# Altium PCB PCB_VHDCI_breakout.PCBDOC (part 3 of 3)
Units mil, origin at the board's own origin, x right, y up, seen from the top; angles counter-clockwise.
Board outline 6299 x 3937 mil, 4 copper layers (TopLayer, Internal Plane 1, Internal Plane 2, BottomLayer), stack 35.551 mil thick; 61 components, 167 nets, 639 pads, 297 vias.
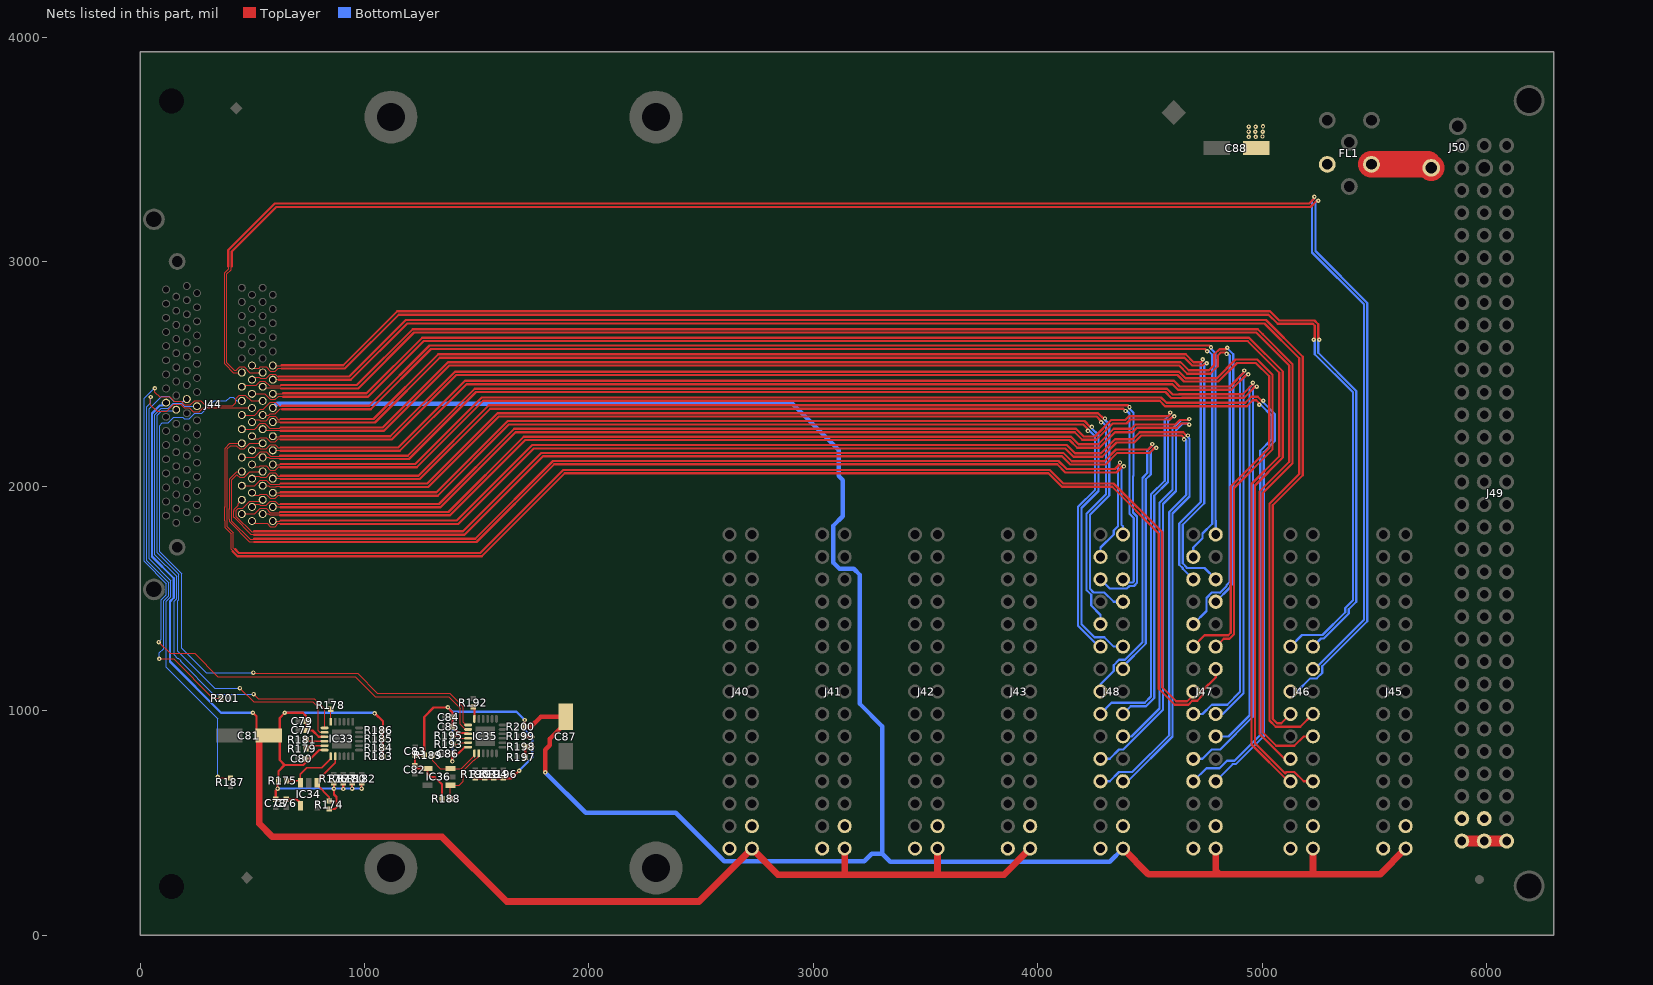
[diagram p5: the nets of this part, all layers, seen from the top]

## Via types
v1: diameter 19.68, hole 7.87, TopLayer to BottomLayer, tented both sides, 274 vias
v2: diameter 23.62, hole 11.81, TopLayer to BottomLayer, tented both sides, 23 vias

## Nets (pads, with @x,y where several pads share a name; then routed paths per layer and width w, separated by ;. In a path a pad name is that pad's centre, name@x,y a point inside that pad or via, vN(x,y) a via of type N, cw(c..) or ccw(c..) an arc to the next point about the centre after c; other vN are vias at no path point) (continued)
LVDS6_4_N: J44.U46 J46.12 | length 6381.9
  TopLayer w5: J44.U46@591.53,2538.23 592.7,2537.05 629.02,2537.05 631.52,2539.55
  TopLayer w10: 631.52,2539.55 905.52,2539.55 1146.02,2780.05 5035.02,2780.05 5076.02,2739.05 5233.24,2739.05 5250.02,2722.27 5250.02,2657.9 v1(5254.87,2653.05)
  BottomLayer w10: J46.12@5226.57,1285.67 5262.95,1322.05 5275.24,1322.05 5386.02,1432.84 5386.02,1452.05 5420.02,1486.05 5420.02,2425.27 5250.02,2595.27 5250.02,2648.21 v1(5254.87,2653.05)
LVDS6_4_P: J44.U12 J46.11 | length 6550.8
  TopLayer w5: J44.U12@499.01,2538.23 510.18,2527.05 530.91,2527.05 535.81,2531.95 562.15,2531.95 581.08,2513.01 601.97,2513.01 616.02,2527.05 629.02,2527.05 631.52,2524.55
  TopLayer w10: 631.52,2524.55 911.74,2524.55 1152.24,2765.05 5028.81,2765.05 5069.81,2724.05 5227.02,2724.05 5235.02,2716.05 5235.02,2657.9 v1(5230.18,2653.05)
  BottomLayer w10: J46.11@5126.57,1285.67 5177.95,1337.05 5269.02,1337.05 5371.02,1439.05 5371.02,1458.27 5405.02,1492.27 5405.02,2419.05 5235.02,2589.05 5235.02,2648.21 v1(5230.18,2653.05)
LVDS6_5_N: J44.U47 J46.15 | length 8099
  TopLayer w5: 408.52,2980.55 406.02,2978.05 406.02,2966.05 387.02,2947.05 387.02,2550.2 420.49,2516.73 428.07,2516.73 443.29,2531.95 464.18,2531.95 489.39,2506.73 J44.U47@546.25,2506.73
  TopLayer w10: 408.52,2980.55 408.52,3046.55 607.02,3245.05 5216.24,3245.05 5243.71,3272.52 v1(5250.55,3272.52)
  BottomLayer w10: J46.15@5126.57,1085.67 5155.85,1085.67 5214.36,1144.17 5243.76,1144.17 5268.07,1168.48 5268.07,1197.88 5469.02,1398.84 5469.02,2817.27 5237.63,3048.66 5237.63,3266.45 5243.71,3272.52 v1(5250.55,3272.52)
LVDS6_5_P: J44.U13 J46.14 | length 7853.9
  TopLayer w5: 393.52,2980.55 396.02,2978.05 396.02,2970.2 377.02,2951.2 377.02,2546.05 416.35,2506.73 J44.U13@453.73,2506.73
  TopLayer w10: 393.52,2980.55 393.52,3052.77 600.81,3260.05 5210.02,3260.05 5233.1,3283.13 v1(5233.1,3289.98)
  BottomLayer w10: J46.14@5226.57,1185.67 5234.64,1185.67 5454.02,1405.05 5454.02,2811.05 5222.63,3042.45 5222.63,3272.66 5233.1,3283.13 v1(5233.1,3289.98)
LVDS6_6_N: J44.U48 J46.18 | length 6642.5
  TopLayer w5: J44.U48@591.53,2475.24 593.35,2477.05 615.37,2477.05 617.87,2474.55
  TopLayer w10: 617.87,2474.55 938.74,2474.55 1190.24,2726.05 5011.02,2726.05 5166.02,2571.05 5166.02,2055.27 5033.02,1922.27 5033.02,956.84 5060.81,929.05 5169.95,929.05 J46.18@5226.57,985.67
LVDS6_6_P: J44.U14 J46.17 | length 6648.6
  TopLayer w5: J44.U14@499.01,2475.24 510.83,2487.05 530.27,2487.05 535.81,2481.52 562.15,2481.52 581.08,2500.45 601.97,2500.45 615.37,2487.05 617.87,2489.55
  TopLayer w10: 617.87,2489.55 932.52,2489.55 1184.02,2741.05 5017.24,2741.05 5181.02,2577.27 5181.02,2049.05 5048.02,1916.05 5048.02,963.05 5067.02,944.05 5084.95,944.05 J46.17@5126.57,985.67
LVDS6_7_N: J44.U49 J46.21 | length 6622
  TopLayer w5: J44.U49@546.25,2443.74 551.25,2438.74 627.02,2438.74 629.52,2436.24
  TopLayer w10: 629.52,2436.24 972.42,2436.24 1221.24,2685.05 4974.02,2685.05 5121.02,2538.05 5121.02,2109.27 4988.02,1976.27 4988.02,898.05 5100.41,785.67 J46.21@5126.57,785.67
LVDS6_7_P: J44.U15 J46.20 | length 6830.5
  TopLayer w5: J44.U15@453.73,2443.74 460.01,2450.02 516.87,2450.02 535.81,2468.96 556.7,2468.96 576.91,2448.74 627.02,2448.74 629.52,2451.24
  TopLayer w10: 629.52,2451.24 966.21,2451.24 1215.02,2700.05 4980.24,2700.05 5003.02,2677.27 5136.02,2544.27 5136.02,2103.05 5003.02,1970.05 5003.02,904.27 5063.12,844.17 5143.76,844.17 5185.25,885.67 J46.20@5226.57,885.67
LVDS6_8_N: J44.U50 J46.24 | length 6708.8
  TopLayer w5: J44.U50@591.53,2412.24 626.83,2412.24 627.02,2412.05 636.02,2412.05 638.52,2414.55
  TopLayer w10: 638.52,2414.55 1009.52,2414.55 1257.02,2662.05 4942.24,2662.05 5092.02,2512.27 5092.02,2128.05 4968.02,2004.05 4968.02,855.27 5102.75,720.54 5109.38,727.17 5143.76,727.17 5185.25,685.67 J46.24@5226.57,685.67
LVDS6_8_P: J44.U16 J46.23 | length 6706.4
  TopLayer w5: J44.U16@499.01,2412.24 555.87,2412.24 581.08,2387.03 601.97,2387.03 617.19,2402.24 619.95,2402.24 620.14,2402.05 636.02,2402.05 638.52,2399.55
  TopLayer w10: 638.52,2399.55 1015.74,2399.55 1263.24,2647.05 4936.02,2647.05 5077.02,2506.05 5077.02,2134.27 4953.02,2010.27 4953.02,849.05 5116.41,685.67 J46.23@5126.57,685.67
LVDS7_1_N: J44.U53 J47.3 | length 5302.5
  TopLayer w5: J44.U53@546.25,2317.76 573.22,2317.76 579.5,2324.03 601.97,2324.03 623.99,2346.05 631.02,2346.05 633.52,2343.55
  TopLayer w10: 633.52,2343.55 1027.74,2343.55 1296.24,2612.05 4745.18,2612.05 v1(4755.1,2602.13)
  BottomLayer w10: J47.3@4693.5,1685.67 4693.5,1726.99 4735,1768.48 4735,1790.03 4778.5,1833.53 4778.5,1837.45 4778.02,1837.92 4778.02,2538.07 4778.29,2538.34 4778.29,2558.92 4778.02,2559.19 4778.02,2586.05 4761.95,2602.13 v1(4755.1,2602.13)
LVDS7_1_P: J44.U19 J47.2 | length 5308.1
  TopLayer w5: J44.U19@453.73,2317.76 510.59,2317.76 535.81,2342.97 549.59,2342.97 581.08,2374.47 601.97,2374.47 620.39,2356.05 631.02,2356.05 633.52,2358.55
  TopLayer w10: 633.52,2358.55 1021.52,2358.55 1290.02,2627.05 4765.09,2627.05 v1(4772.55,2619.59)
  BottomLayer w10: v1(4772.55,2619.59) 4772.55,2612.74 4793.02,2592.27 4793.02,2565.4 4793.29,2565.13 4793.29,2532.13 4793.02,2531.86 4793.02,1848.05 4793.5,1847.58 J47.2@4793.5,1785.67
LVDS7_2_N: J44.U54 J47.6 | length 5421.8
  TopLayer w5: J44.U54@591.53,2286.26 592.32,2287.05 623.02,2287.05 625.52,2284.55
  TopLayer w10: 625.52,2284.55 1046.74,2284.55 1335.24,2573.05 4653.81,2573.05 4688.7,2538.16 4736.13,2538.16 4746.6,2548.63 v1(4753.45,2548.63)
  BottomLayer w10: v1(4753.45,2548.63) 4751.02,2551.05 4749.02,2551.05 4742.02,2544.05 4742.02,1924.05 4646.63,1828.66 4646.63,1656.66 4662.68,1640.62 4662.68,1637.71 4664.33,1636.05 4743.11,1636.05 J47.6@4793.5,1585.67
LVDS7_2_P: J44.U20 J47.5 | length 5453.3
  TopLayer w5: J44.U20@499.01,2286.26 509.8,2297.05 531.29,2297.05 535.81,2292.54 562.15,2292.54 581.08,2311.48 601.97,2311.48 616.39,2297.05 623.02,2297.05 625.52,2299.55
  TopLayer w10: 625.52,2299.55 1040.52,2299.55 1329.02,2588.05 4660.02,2588.05 4694.92,2553.16 4729.92,2553.16 4735.99,2559.24 v1(4735.99,2566.09)
  BottomLayer w10: J47.5@4693.5,1585.67 4646.02,1633.15 4646.02,1636.05 4631.02,1651.05 4631.02,1834.27 4727.02,1930.27 4727.02,2550.27 4738.42,2561.66 4738.42,2563.66 v1(4735.99,2566.09)
LVDS7_3_N: J44.U55 J47.9 | length 5810.7
  TopLayer w5: J44.U55@546.25,2254.76 551.25,2249.76 623.02,2249.76 625.52,2247.26
  TopLayer w10: 625.52,2247.26 1087.45,2247.26 1378.24,2538.05 4630.81,2538.05 4666.81,2502.05 4769.24,2502.05 4802.02,2534.84 4802.02,2582.4 4816.02,2596.4 4835.68,2596.4 v1(4842.02,2590.05)
  BottomLayer w10: J47.9@4693.5,1385.67 4752,1444.17 4752,1502.86 4776.31,1527.17 4810.69,1527.17 4812.23,1525.62 4841.35,1554.73 4841.35,1559.59 4856.47,1574.71 4856.47,2582.61 4847.02,2592.05 4844.02,2592.05 v1(4842.02,2590.05)
LVDS7_3_P: J44.U21 J47.8 | length 5791.8
  TopLayer w5: J44.U21@453.73,2254.76 510.59,2254.76 535.81,2279.98 556.7,2279.98 576.91,2259.76 623.02,2259.76 625.52,2262.26
  TopLayer w10: 625.52,2262.26 1081.23,2262.26 1372.02,2553.05 4637.02,2553.05 4673.02,2517.05 4763.02,2517.05 4787.02,2541.05 4787.02,2588.61 4809.81,2611.4 4838.68,2611.4 v1(4845.02,2617.74)
  BottomLayer w10: J47.8@4793.5,1485.67 4857.02,1549.19 4857.02,1554.05 4872.02,1569.05 4872.02,1573.05 4871.47,1573.61 4871.47,2588.82 4845.02,2615.27 v1(4845.02,2617.74)
LVDS7_4_N: J44.U56 J47.12 | length 5982.5
  TopLayer w5: J44.U56@591.53,2223.27 593.74,2221.05 623.02,2221.05 625.52,2223.55
  TopLayer w10: 625.52,2223.55 1115.52,2223.55 1403.02,2511.05 4629.53,2511.05 4658.53,2482.05 4799.02,2482.05 4882.02,2565.05 4978.24,2565.05 5047.02,2496.27 5047.02,2164.84 4875.02,1992.84 4875.02,1340.84 4855.24,1321.05 4828.88,1321.05 J47.12@4793.5,1285.67
LVDS7_4_P: J44.U22 J47.11 | length 6151.3
  TopLayer w5: J44.U22@499.01,2223.27 511.22,2211.05 529.87,2211.05 535.81,2216.99 562.15,2216.99 581.08,2198.05 601.97,2198.05 614.98,2211.05 623.02,2211.05 625.52,2208.55
  TopLayer w10: 625.52,2208.55 1121.74,2208.55 1409.24,2496.05 4623.31,2496.05 4652.31,2467.05 4805.24,2467.05 4888.24,2550.05 4972.02,2550.05 5032.02,2490.05 5032.02,2171.05 4860.02,1999.05 4860.02,1347.05 4849.02,1336.05 4743.88,1336.05 J47.11@4693.5,1285.67
LVDS7_5_N: J44.U57 J47.15 | length 5933.6
  TopLayer w5: 422.63,1721.13 419.09,1721.13 415.72,1724.5 415.72,1793.13 412.79,1796.05 388.67,1820.18 388.67,1849.65 388.52,1849.8 388.52,1903.82 388.67,1903.97 388.67,2166.41 404.02,2181.77 428.07,2181.77 443.29,2166.55 464.18,2166.55 489.39,2191.77 J44.U57@546.25,2191.77
  TopLayer w10: 422.63,1721.13 440.36,1703.39 1516.36,1703.39 1886.02,2073.05 4054.24,2073.05 4114.24,2013.05 4338.24,2013.05 4555.02,1796.27 4555.02,1104.05 4617.02,1042.05 4666.02,1042.05 4693.5,1069.53 J47.15@4693.5,1085.67
LVDS7_5_P: J44.U23 J47.14 | length 6034.2
  TopLayer w5: 412.02,1710.52 412.02,1714.05 405.72,1720.36 405.72,1788.98 378.67,1816.03 378.67,1845.5 378.52,1845.65 378.52,1907.97 378.67,1908.12 378.67,2170.56 399.88,2191.77 J44.U23@453.73,2191.77
  TopLayer w10: 412.02,1710.52 434.15,1688.39 1522.58,1688.39 1892.24,2058.05 4048.02,2058.05 4108.02,1998.05 4332.02,1998.05 4540.02,1790.05 4540.02,1097.84 4610.81,1027.05 4672.24,1027.05 4689.36,1044.17 4710.69,1044.17 4735,1068.48 4735,1089.81 4793.5,1148.32 J47.14@4793.5,1185.67
LVDS7_6_N: J44.U58 J47.18 | length 6105.1
  TopLayer w5: J44.U58@591.53,2160.28 592.31,2161.05 623.02,2161.05 625.52,2158.55
  TopLayer w10: 625.52,2158.55 1157.74,2158.55 1454.24,2455.05 4600.81,2455.05 4625.81,2430.05 4863.02,2430.05 4931.6,2498.63 v1(4938.45,2498.63)
  BottomLayer w10: J47.18@4793.5,985.67 4824.64,985.67 4917.02,1078.05 4917.02,2484.05 4931.6,2498.63 v1(4938.45,2498.63)
LVDS7_6_P: J44.U24 J47.17 | length 6298.8
  TopLayer w5: J44.U24@499.01,2160.28 509.79,2171.05 531.31,2171.05 535.81,2166.55 562.15,2166.55 581.08,2185.49 601.97,2185.49 616.41,2171.05 623.02,2171.05 625.52,2173.55
  TopLayer w10: 625.52,2173.55 1151.52,2173.55 1448.02,2470.05 4607.02,2470.05 4632.02,2445.05 4856.81,2445.05 4920.99,2509.24 v1(4920.99,2516.09)
  BottomLayer w10: J47.17@4693.5,985.67 4734.82,985.67 4776.31,1027.17 4844.92,1027.17 4902.02,1084.27 4902.02,2490.27 4920.99,2509.24 v1(4920.99,2516.09)
LVDS7_7_N: J44.U59 J47.21 | length 6414.6
  TopLayer w5: J44.U59@546.25,2128.78 573.22,2128.78 577.94,2124.05 622.02,2124.05 624.52,2121.55
  TopLayer w10: 624.52,2121.55 1198.74,2121.55 1497.24,2420.05 4569.81,2420.05 4595.81,2394.05 4643.02,2394.05 4644.02,2395.05 4920.02,2395.05 4969.6,2444.63 v1(4976.45,2444.63)
  BottomLayer w10: J47.21@4693.5,785.67 4734.82,785.67 4776.31,827.17 4813.35,827.17 4959.02,972.84 4959.02,2434.05 4969.6,2444.63 v1(4976.45,2444.63)
LVDS7_7_P: J44.U25 J47.20 | length 6363.8
  TopLayer w5: J44.U25@453.73,2128.78 510.59,2128.78 535.81,2154 562.15,2154 582.09,2134.05 622.02,2134.05 624.52,2136.55
  TopLayer w10: 624.52,2136.55 1192.52,2136.55 1491.02,2435.05 4576.02,2435.05 4602.02,2409.05 4630.02,2409.05 4631.02,2410.05 4913.81,2410.05 4958.99,2455.24 v1(4958.99,2462.09)
  BottomLayer w10: J47.20@4793.5,885.67 4850.64,885.67 4944.02,979.05 4944.02,2440.27 4958.99,2455.24 v1(4958.99,2462.09)
LVDS7_8_N: J44.U60 J47.24 | length 6400
  TopLayer w5: J44.U60@591.53,2097.28 591.76,2097.05 623.02,2097.05 625.52,2099.55
  TopLayer w10: 625.52,2099.55 1226.52,2099.55 1523.02,2396.05 4550.02,2396.05 4574.02,2372.05 4925.31,2372.05 4952.31,2399.05 4980.24,2399.05 4998.21,2381.09 v1(5005.05,2381.09)
  BottomLayer w10: J47.24@4793.5,685.67 4869.88,762.05 4883.24,762.05 5007.02,885.84 5007.02,2152.05 5057.02,2202.05 5057.02,2322.27 5005.05,2374.24 v1(5005.05,2381.09)
LVDS7_8_P: J44.U26 J47.23 | length 6568.8
  TopLayer w5: J44.U26@499.01,2097.28 509.24,2087.05 531.86,2087.05 535.81,2091 562.15,2091 581.08,2072.07 601.97,2072.07 616.96,2087.05 623.02,2087.05 625.52,2084.55
  TopLayer w10: 625.52,2084.55 1232.74,2084.55 1529.24,2381.05 4543.81,2381.05 4567.81,2357.05 4931.52,2357.05 4958.52,2384.05 4974.02,2384.05 4987.6,2370.48 v1(4987.6,2363.63)
  BottomLayer w10: J47.23@4693.5,685.67 4752,744.17 4810.69,744.17 4843.57,777.05 4877.02,777.05 4992.02,892.05 4992.02,2158.27 5042.02,2208.27 5042.02,2316.05 4994.45,2363.63 v1(4987.6,2363.63)
LVDS8_1_N: J44.U61 J48.3 | length 4969.8
  TopLayer w5: 507.52,1766.55 505.02,1764.05 490.02,1764.05 408.67,1845.41 408.67,1857.93 408.52,1858.08 408.52,1895.54 408.67,1895.69 408.67,2028.55 431.98,2051.87 443.29,2040.57 464.18,2040.57 489.39,2065.79 J44.U61@546.25,2065.79
  TopLayer w10: 507.52,1766.55 1493.52,1766.55 1840.02,2113.05 4093.02,2113.05 4129.02,2077.05 4344.81,2077.05 4366.99,2099.24 v1(4366.99,2106.09)
  BottomLayer w10: J48.3@4280.11,1685.67 4280.11,1726.99 4338.62,1785.49 4338.62,1802.86 4358.31,1822.55 4358.02,1822.84 4358.02,2090.27 4366.99,2099.24 v1(4366.99,2106.09)
LVDS8_1_P: J44.U27 J48.2 | length 4767.4
  TopLayer w5: J44.U27@453.73,2065.79 431.76,2065.79 398.67,2032.7 398.67,1899.83 398.52,1899.68 398.52,1853.94 398.67,1853.79 398.67,1841.27 485.88,1754.05 505.02,1754.05 507.52,1751.55
  TopLayer w10: 507.52,1751.55 1499.74,1751.55 1846.24,2098.05 4086.81,2098.05 4122.81,2062.05 4351.02,2062.05 4377.6,2088.63 v1(4384.45,2088.63)
  BottomLayer w10: J48.2@4380.11,1785.67 4380.11,1821.96 4373.02,1829.05 4373.02,2084.05 4377.6,2088.63 v1(4384.45,2088.63)
LVDS8_2_N: J44.U62 J48.6 | length 4770.3
  TopLayer w5: J44.U62@591.53,2034.29 592.29,2035.05 623.02,2035.05 625.52,2032.55
  TopLayer w10: 625.52,2032.55 1246.74,2032.55 1560.24,2346.05 4381.18,2346.05 v1(4391.6,2335.63)
  BottomLayer w10: J48.6@4380.11,1585.67 4394.73,1571.05 4423.02,1571.05 4428.02,1576.05 4428.02,1859.05 4409.63,1877.45 4409.63,2324.45 4398.45,2335.63 v1(4391.6,2335.63)
LVDS8_2_P: J44.U28 J48.5 | length 5054.3
  TopLayer w5: J44.U28@499.01,2034.29 509.77,2045.05 531.32,2045.05 535.81,2040.57 562.15,2040.57 581.08,2059.51 601.97,2059.51 616.43,2045.05 623.02,2045.05 625.52,2047.55
  TopLayer w10: 625.52,2047.55 1240.52,2047.55 1554.02,2361.05 4401.09,2361.05 v1(4409.05,2353.09)
  BottomLayer w10: J48.5@4280.11,1585.67 4321.61,1544.17 4397.3,1544.17 4409.18,1556.05 4429.24,1556.05 4443.02,1569.84 4443.02,1865.27 4424.63,1883.66 4424.63,2044.82 4426.87,2047.05 4426.87,2328.43 4409.05,2346.24 v1(4409.05,2353.09)
LVDS8_3_N: J44.U63 J48.9 | length 4857.2
  TopLayer w5: J44.U63@546.25,2002.79 573.22,2002.79 576.94,1999.07 606.11,1999.07 607.1,2000.05 623.02,2000.05 625.52,1997.55
  TopLayer w10: 625.52,1997.55 1285.52,1997.55 1599.02,2311.05 4263.02,2311.05 4282.6,2291.48 v1(4282.6,2284.63)
  BottomLayer w10: J48.9@4280.11,1385.67 4280.11,1426.99 4238.62,1468.48 4238.62,1516.56 4218.18,1537 4218.18,1879.42 4304.02,1965.27 4304.02,2270.05 4289.45,2284.63 v1(4282.6,2284.63)
LVDS8_3_P: J44.U29 J48.8 | length 4978.9
  TopLayer w5: J44.U29@453.73,2002.79 510.59,2002.79 535.81,2028.01 562.15,2028.01 581.08,2009.07 601.97,2009.07 602.95,2010.05 623.02,2010.05 625.52,2012.55
  TopLayer w10: 625.52,2012.55 1279.31,2012.55 1592.81,2326.05 4269.24,2326.05 4293.21,2302.09 v1(4300.05,2302.09)
  BottomLayer w10: v1(4300.05,2302.09) 4300.05,2295.24 4319.02,2276.27 4319.02,1959.05 4233.18,1873.21 4233.18,1543.21 4249.22,1527.17 4297.3,1527.17 4338.8,1485.67 J48.8@4380.11,1485.67
LVDS8_4_N: J44.U64 J48.12 | length 4943
  TopLayer w5: J44.U64@591.53,1971.3 591.77,1971.05 623.02,1971.05 625.52,1973.55
  TopLayer w10: 625.52,1973.55 1320.52,1973.55 1638.02,2291.05 4208.24,2291.05 4234.71,2264.59 v1(4241.55,2264.59)
  BottomLayer w10: v1(4241.55,2264.59) 4241.55,2257.74 4271.02,2228.27 4271.02,1979.05 4195.02,1903.05 4195.02,1385.27 4253.13,1327.17 4297.3,1327.17 4338.8,1285.67 J48.12@4380.11,1285.67
LVDS8_4_P: J44.U30 J48.11 | length 4949.1
  TopLayer w5: J44.U30@499.01,1971.3 509.25,1961.05 531.84,1961.05 535.81,1965.02 562.15,1965.02 581.08,1946.08 601.97,1946.08 616.95,1961.05 623.02,1961.05 625.52,1958.55
  TopLayer w10: 625.52,1958.55 1326.74,1958.55 1644.24,2276.05 4202.02,2276.05 4224.1,2253.98 v1(4224.1,2247.13)
  BottomLayer w10: v1(4224.1,2247.13) 4230.95,2247.13 4256.02,2222.05 4256.02,1985.27 4180.02,1909.27 4180.02,1379.05 4273.41,1285.67 J48.11@4280.11,1285.67
LVDS8_5_N: J44.U65 J48.15 | length 5686.2
  TopLayer w5: 508.52,1799.55 506.02,1797.05 497.02,1797.05 428.67,1865.41 428.67,1866.22 428.52,1866.37 428.52,1887.26 428.67,1887.41 428.67,1893.26 437.43,1902.03 457.07,1902.03 488.56,1933.52 539.97,1933.52 J44.U65@546.25,1939.8
  TopLayer w10: 508.52,1799.55 1439.52,1799.55 1789.02,2149.05 4114.53,2149.05 4151.53,2112.05 4296.81,2112.05 4348.81,2164.05 4492.81,2164.05 4510.49,2181.74 v1(4510.49,2188.59)
  BottomLayer w10: J48.15@4280.11,1085.67 4280.11,1118.36 4338.62,1176.86 4338.62,1202.86 4362.93,1227.17 4388.92,1227.17 4467.02,1305.27 4467.02,2037.45 4488.63,2059.05 4488.63,2159.87 4511.42,2182.66 4511.42,2187.66 v1(4510.49,2188.59)
LVDS8_5_P: J44.U31 J48.14 | length 5476.5
  TopLayer w5: J44.U31@453.73,1939.8 436.51,1922.58 436.51,1915.25 418.67,1897.41 418.67,1891.55 418.52,1891.4 418.52,1862.22 418.67,1862.07 418.67,1861.27 492.88,1787.05 506.02,1787.05 508.52,1784.55
  TopLayer w10: 508.52,1784.55 1445.74,1784.55 1795.24,2134.05 4108.31,2134.05 4145.31,2097.05 4303.02,2097.05 4355.02,2149.05 4499.02,2149.05 4521.1,2171.13 v1(4527.95,2171.13)
  BottomLayer w10: J48.14@4380.11,1185.67 4380.11,1197.14 4482.02,1299.05 4482.02,2031.23 4503.63,2052.84 4503.63,2153.66 4522.02,2172.05 4527.02,2172.05 v1(4527.95,2171.13)
LVDS8_6_N: J44.U66 J48.18 | length 5678.8
  TopLayer w5: J44.U66@591.53,1908.31 592.28,1909.05 623.02,1909.05 625.52,1906.55
  TopLayer w10: 625.52,1906.55 1338.74,1906.55 1673.24,2241.05 4164.81,2241.05 4198.58,2207.29 4261.6,2207.29 4334.37,2280.05 4396.02,2280.05 4413.52,2297.55 4587.74,2297.55 4601.71,2311.52 v1(4608.55,2311.52)
  BottomLayer w10: J48.18@4380.11,985.67 4414.5,1020.05 4483.24,1020.05 4520.02,1056.84 4520.02,1958.05 4581.02,2019.05 4581.02,2290.84 4601.71,2311.52 v1(4608.55,2311.52)
LVDS8_6_P: J44.U32 J48.17 | length 5872.6
  TopLayer w5: J44.U32@499.01,1908.31 509.76,1919.05 531.34,1919.05 535.81,1914.59 562.15,1914.59 581.08,1933.52 601.97,1933.52 616.44,1919.05 623.02,1919.05 625.52,1921.55
  TopLayer w10: 625.52,1921.55 1332.52,1921.55 1667.02,2256.05 4171.02,2256.05 4204.79,2222.29 4255.39,2222.29 4328.16,2295.05 4389.81,2295.05 4407.31,2312.55 4581.52,2312.55 4591.1,2322.13 v1(4591.1,2328.98)
  BottomLayer w10: J48.17@4280.11,985.67 4329.5,1035.05 4477.02,1035.05 4505.02,1063.05 4505.02,1964.27 4566.02,2025.27 4566.02,2297.05 4591.1,2322.13 v1(4591.1,2328.98)
LVDS8_7_N: J44.U67 J48.21 | length 6043.1
  TopLayer w5: J44.U67@546.25,1876.81 573.22,1876.81 576.94,1873.09 622.02,1873.09 624.52,1870.59
  TopLayer w10: 624.52,1870.59 1380.77,1870.59 1716.24,2206.05 4141.81,2206.05 4175.81,2172.05 4275.87,2172.05 4344.87,2241.05 4423.02,2241.05 4443.02,2261.05 4620.02,2261.05 4639.02,2280.05 4670.18,2280.05 v1(4675.02,2275.21)
  BottomLayer w10: J48.21@4280.11,785.67 4321.43,785.67 4362.93,827.17 4381.35,827.17 4558.02,1003.84 4558.02,1921.05 4616.02,1979.05 4616.02,2250.05 4646.02,2280.05 4670.18,2280.05 v1(4675.02,2275.21)
LVDS8_7_P: J44.U33 J48.20 | length 6017.1
  TopLayer w5: J44.U33@453.73,1876.81 510.59,1876.81 535.81,1902.03 562.15,1902.03 581.08,1883.09 622.02,1883.09 624.52,1885.59
  TopLayer w10: 624.52,1885.59 1374.56,1885.59 1710.02,2221.05 4148.02,2221.05 4182.02,2187.05 4269.65,2187.05 4338.65,2256.05 4416.81,2256.05 4436.81,2276.05 4613.81,2276.05 4632.81,2295.05 4670.18,2295.05 v1(4675.02,2299.9)
  BottomLayer w10: J48.20@4380.11,885.67 4418.64,885.67 4543.02,1010.05 4543.02,1927.27 4601.02,1985.27 4601.02,2256.27 4639.81,2295.05 4670.18,2295.05 v1(4675.02,2299.9)
LVDS8_8_N: J44.U68 J48.24 | length 5958.3
  TopLayer w5: J44.U68@591.53,1845.31 591.79,1845.05 623.02,1845.05 625.52,1847.55
  TopLayer w10: 625.52,1847.55 1411.52,1847.55 1748.02,2184.05 4129.02,2184.05 4166.02,2147.05 4281.81,2147.05 4344.81,2210.05 4423.81,2210.05 4454.81,2241.05 4648.24,2241.05 4662.71,2226.59 v1(4669.55,2226.59)
  BottomLayer w10: J48.24@4380.11,685.67 4401.64,685.67 4601.02,885.05 4601.02,1879.05 4676.92,1954.95 4676.92,2212.37 4669.55,2219.74 v1(4669.55,2226.59)
LVDS8_8_P: J44.U34 J48.23 | length 6123.9
  TopLayer w5: J44.U34@499.01,1845.31 509.27,1835.05 566.13,1835.05 581.08,1820.1 601.97,1820.1 616.93,1835.05 623.02,1835.05 625.52,1832.55
  TopLayer w10: 625.52,1832.55 1417.74,1832.55 1754.24,2169.05 4122.81,2169.05 4159.81,2132.05 4288.02,2132.05 4351.02,2195.05 4430.02,2195.05 4461.02,2226.05 4642.02,2226.05 4652.1,2215.98 v1(4652.1,2209.13)
  BottomLayer w10: J48.23@4280.11,685.67 4321.43,685.67 4362.93,727.17 4421.92,727.17 4586.02,891.27 4586.02,1885.27 4661.92,1961.16 4661.92,2206.16 4658.95,2209.13 v1(4652.1,2209.13)
NetFL1_1: FL1.1 J50.1 | length 272.8
  TopLayer w118.11: FL1.1@5487.43,3434.57 5738.2,3434.57 J50.1@5753.78,3419
NetIC33_1: IC33.1 IC34.3 R175.1 | length 278
  TopLayer w6: R175.1@653.53,688.05 705.8,688.05 IC34.3@714.62,679.24 714.62,717.65 743.02,746.05 810.02,746.05 849.81,785.84 IC33.1@849.81,797.28
NetIC33_2: IC33.2 IC34.1 R174.1 | length 253.5
  TopLayer w6: R174.1@844.02,599.56 844.02,615.05 789.43,669.65 IC34.1@789.43,679.24 789.43,688.46 869.5,768.53 IC33.2@869.5,797.28
NetIC33_18: IC33.18 R178.2 | length 55.8
  TopLayer w5: IC33.18@849.81,950.83 849.81,1006.34 R178.2@850.02,1006.55
NetIC33_22: IC33.22 R181.2 | length 84.6
  TopLayer w6: R181.2@740.53,871.05 747.37,864.21 IC33.22@822.25,864.21
NetIC33_23: IC33.23 R179.2 | length 87.7
  TopLayer w6: R179.2@740.53,830.05 755,844.53 IC33.23@822.25,844.53
NetIC35_1: IC35.1 IC36.3 R189.1 | length 260.1
  TopLayer w5: R189.1@1303.53,802.05 1303.53,776.55 1337.62,742.46 IC36.3@1383.2,742.46 1432.43,742.46 1489.81,799.84 IC35.1@1489.81,810.28
NetIC35_2: IC35.2 IC36.1 R188.1 | length 280.4
  TopLayer w5: R188.1@1382.53,607.05 1383.2,607.73 IC36.1@1383.2,667.65 1421.62,667.65 1440.02,686.05 1440.02,731.58 1486.84,778.4 1490.37,778.4 1509.5,797.53 IC35.2@1509.5,810.28
NetIC35_18: IC35.18 R192.2 | length 55.7
  TopLayer w10: R192.2@1485.02,1017.55 1489.81,1012.76 IC35.18@1489.81,963.83
NetIC35_22: IC35.22 R195.2 | length 72.2
  TopLayer w5: R195.2@1394.53,888.05 1420.02,888.05 1430.87,877.21 IC35.22@1462.25,877.21
NetIC35_23: IC35.23 R193.2 | length 70.8
  TopLayer w5: R193.2@1394.53,850.05 1425.02,850.05 1432.5,857.53 IC35.23@1462.25,857.53
NetJ44_L18: J44.L18 R187.2 | length 2054.6
  TopLayer w5: v1(346.02,705.05) 350.52,700.56 R187.2@403.02,700.56
  BottomLayer w5: J44.L18@208.46,2388.62 208.46,2379.15 150.77,2379.15 127.87,2402.05 97.02,2402.05 40.02,2345.05 40.02,1676.98 137.73,1579.27 137.73,1509.03 116.02,1487.32 116.02,1194.05 346.02,964.05 v1(346.02,705.05)
NetJ44_U18: J44.U18 R201.2 | length 2115.5
  TopLayer w5: v1(48.02,2398.05) 46.02,2396.05 46.02,2364.05 76.02,2334.05 104.45,2334.05 105.49,2335.1 119.27,2335.1 150.77,2366.59 180.68,2366.59 196.43,2350.85 218.9,2350.85 237.84,2331.91 264.18,2331.91 281.52,2349.25 J44.U18@499.01,2349.25 ; v1(86,1231) 149.08,1231 324.02,1056.05 R201.2@361.52,1056.05
  BottomLayer w5: v1(48.02,2398.05) 48.02,2373.02 30,2355 30,1669 127.73,1571.27 127.73,1513.17 105,1490.44 105,1277 86,1258 v1(86,1231)
P3V3_MP1: C76.2 C77.2 C78.2 C79.2 C80.2 C81.1 IC33.21 IC33.24 IC34.4 J40.30 J41.30 J42.30 J43.30 J44.L52 R174.2 R175.2 R176.2 R177.2 R180.2 R182.2 R183.2 R184.2 R185.2 R186.2 | length 8408.1
  TopLayer w10: v1(503.02,991.05) 519.02,975.05 C81.1@519.02,908.05 ; IC34.4@708.02,595.05 698.31,604.77 C76.2@652.02,604.77 C78.2@605.02,604.77 605.02,645.05 v1(613.02,653.05) 613.02,684.56 R175.2@616.52,688.05 616.52,730.55 644.02,758.05 ; IC33.24@822.25,824.84 798.81,824.84 761.02,787.05 C80.2@738.74,787.05 738.74,769.77 727.02,758.05 644.02,758.05 ; IC33.21@822.25,883.9 796.18,883.9 768.02,912.05 C77.2@739.74,912.05 C79.2@739.74,954.05 739.74,976.34 725.02,991.05 v1(645.02,991.05) 622.02,968.05 622.02,780.05 644.02,758.05 ; R174.2@844.02,561.55 866.52,561.55 875.02,570.05 875.02,616.05 864.02,627.05 v1(864.02,652.05) R176.2@864.02,677.55 ; v1(905.02,651.05) R177.2@905.02,677.55 ; v1(945.02,653.05) R180.2@945.02,677.55 ; v1(987.02,653.05) R182.2@987.02,678.55 ; v1(1045.02,988.05) 1047.02,988.05 1082.53,952.55 R186.2@1082.53,912.05 R185.2@1082.53,874.05 R184.2@1082.53,835.05 R183.2@1082.53,796.05
  TopLayer w20: J43.30@3951.64,385.67 J43.30@3966.73,385.67
  TopLayer w30: C81.1@531.02,872.05 531.02,497.05 590.02,438.05 1346.02,438.05 1634.02,150.05 2490.95,150.05 J40.30@2726.57,385.67 2843.19,269.05 3135.02,269.05 ; J41.30@3139.96,385.67 3139.96,273.99 3135.02,269.05 ; J42.30@3553.34,385.67 3553.34,271.74 3556.02,269.05 ; J43.30@3966.73,385.67 3850.11,269.05 3556.02,269.05 ; 3135.02,269.05 3556.02,269.05
  BottomLayer w10: J44.L52@115.94,2372.87 101.02,2372.87 101.02,2360.16 88.31,2360.16 53.03,2324.88 53.03,1687.05 150.23,1589.85 150.23,1503.85 133.02,1486.64 133.02,1218.99 360.96,991.05 v1(503.02,991.05) ; v1(613.02,653.05) v1(945.02,653.05) v1(987.02,653.05) ; v1(645.02,991.05) 1042.02,991.05 v1(1045.02,988.05)
P3V3_MP2: C82.2 C83.2 C84.2 C85.2 C86.2 C87.1 IC35.21 IC35.24 IC36.4 J44.U52 J45.30 J46.30 J47.30 J48.30 R188.2 R189.2 R190.2 R191.2 R194.2 R196.2 R197.2 R198.2 R199.2 R200.2 | length 11548.7
  TopLayer w10: R188.2@1345.52,607.05 1345.52,671.87 1313.34,704.05 1298.02,704.05 1280.84,721.24 IC36.4@1280.84,742.46 1236.34,742.46 C82.2@1225.02,753.77 1225.02,801.34 C83.2@1226.02,802.34 1266.24,802.34 R189.2@1266.52,802.05 1266.52,972.55 1308.02,1014.05 1371.02,1014.05 1392.74,992.34 C84.2@1392.74,970.05 C85.2@1392.74,928.05 1420.24,900.55 1458.59,900.55 IC35.21@1462.25,896.9 ; v1(1392.02,774.05) 1391.74,774.34 C86.2@1391.74,809.05 1418.02,809.05 1446.81,837.84 IC35.24@1462.25,837.84 ; R190.2@1494.02,699.55 R191.2@1535.02,699.55 R194.2@1577.02,699.55 R196.2@1618.02,699.55 1655.52,699.55 v1(1689.02,733.05) ; R200.2@1714.53,928.05 v1(1714.53,958.56) ; R199.2@1715.53,887.05 1719.53,883.05 v1(1747.02,883.05) ; R197.2@1716.53,793.05 R198.2@1716.53,839.05 1747.02,839.05 v1(1748.02,840.05)
  TopLayer w20: R200.2@1714.53,928.05 1741.02,928.05 1786.61,973.64 C87.1@1897.02,973.64 1897.02,945.05 1826.02,874.05 1826.02,846.05 1806.02,826.05 v1(1806.02,725.05)
  TopLayer w30: J48.30@4380.11,385.67 4494.73,271.05 4811.02,271.05 ; J47.30@4793.5,385.67 4793.5,288.58 4811.02,271.05 ; J46.30@5226.57,385.67 5226.57,271.6 5226.02,271.05 ; J45.30@5639.96,385.67 5525.34,271.05 5226.02,271.05 ; 4811.02,271.05 5226.02,271.05
  BottomLayer w10: v1(1372.02,1015.05) 1392.02,995.05 ; v1(1392.02,774.05) 1392.02,995.05 ; v1(1689.02,733.05) 1748.02,792.05 v1(1748.02,840.05) 1748.02,882.05 v1(1747.02,883.05) 1714.53,915.55 v1(1714.53,958.56) 1678.03,995.05 1392.02,995.05
  BottomLayer w20: J44.U52@591.53,2349.25 611.33,2369.05 2907.02,2369.05 3114.02,2162.05 3114.02,2046.05 3132.02,2028.05 3132.02,1867.05 3090.02,1825.05 3090.02,1659.05 3116.91,1632.17 3180.91,1632.17 3208.02,1605.05 3208.02,1030.05 3308.02,930.05 3308.02,362.05 ; v1(1806.02,725.05) 1986.02,545.05 2387.02,545.05 2603.02,329.05 3227.02,329.05 3260.02,362.05 3308.02,362.05 ; J48.30@4380.11,385.67 4321.11,326.67 3343.41,326.67 3308.02,362.05
P5V0: J49.a32 J49.b32 J49.c32 | length 200
  TopLayer w50: J49.c32@5890,419 J49.b32@5990,419 J49.a32@6090,419
P12V0: C88.1 FL1.2 J40.28 J40.29 J41.28 J41.29 J42.28 J42.29 J43.28 J43.29 J45.28 J45.29 J46.28 J46.29 J47.28 J47.29 J48.28 J48.29 J49.b31 J49.c31
  other v1: 4941.02,3557.05 4972,3557 5002,3559 4970,3580 5003,3580 4940,3581 4971,3602 4941.02,3603.05 5004,3604
VHDCI1_SCL: IC33.19 J44.L17 | length 2185.8
  TopLayer w5: v1(506.02,1074.05) 526.02,1054.05 776.02,1054.05 822.25,1007.83 IC33.19@822.25,923.27
  BottomLayer w5: J44.L17@253.73,2357.13 197.91,2357.13 185.89,2369.15 147.88,2369.15 126.38,2347.66 93.48,2347.66 65.53,2319.7 65.53,1695.47 162.73,1598.27 162.73,1498.67 152.02,1487.97 152.02,1249.05 166.68,1234.4 170.21,1234.4 180.37,1224.24 180.37,1220.71 327.02,1074.05 v1(506.02,1074.05)
VHDCI1_SDA: IC33.20 J44.L51 | length 2051.9
  TopLayer w5: v1(445.02,1101.05) 507.02,1039.05 769.02,1039.05 793.02,1015.05 793.02,911.05 800.5,903.58 IC33.20@822.25,903.58
  BottomLayer w5: J44.L51@161.21,2341.38 157.49,2337.66 97.63,2337.66 77.02,2317.05 77.02,1702.98 172.73,1607.27 172.73,1494.53 169.02,1490.82 169.02,1264.05 332.02,1101.05 v1(445.02,1101.05)
VHDCI2_SCL: IC35.19 J44.U17 | length 2926.1
  TopLayer w5: J44.U17@453.73,2380.75 J44.U17@453.73,2382.34 ; v1(505.02,1170.05) 509.02,1166.05 970.02,1166.05 1058.02,1078.05 1380.02,1078.05 1439.52,1018.55 1439.52,948.55 1451.81,936.27 IC35.19@1462.25,936.27
  BottomLayer w5: J44.U17@453.73,2380.75 431.86,2380.75 415.21,2397.4 400.84,2397.4 384.19,2380.75 329.72,2380.75 274.02,2325.05 243.54,2325.05 218.9,2300.41 198.01,2300.41 190.37,2308.05 150.02,2308.05 125.02,2283.05 99.02,2283.05 87.02,2271.05 87.02,1708.98 186.02,1609.98 186.02,1279.05 295.02,1170.05 v1(505.02,1170.05)
VHDCI2_SDA: IC35.20 J44.U51 | length 3368.4
  TopLayer w5: v1(66.33,2437.36) 66.33,2419.75 87.99,2398.09 131.83,2398.09 151.87,2378.05 183.36,2378.05 198.01,2363.41 224.35,2363.41 243.29,2382.34 270.74,2382.34 293.02,2360.05 412.55,2360.05 425.37,2372.87 425.37,2389.4 441.93,2405.96 469.63,2405.96 494.84,2380.75 J44.U51@546.25,2380.75 ; v1(83,1306) 133.95,1255.05 243.02,1255.05 347.02,1151.05 958.02,1151.05 1047.02,1062.05 1375.02,1062.05 1426.02,1011.05 1426.02,940.05 1449.5,916.58 IC35.20@1462.25,916.58
  BottomLayer w5: v1(66.33,2437.36) 62.8,2437.36 18,2392.56 18,1666 117.73,1566.27 117.73,1517.31 95,1494.58 95,1318 v1(83,1306)
pads on no net: FTG25.FTG2 FTG26.1 FTG27.1 FTG28.1 IC33.12 IC33.13 IC33.14 IC33.15 IC33.16 IC33.17 IC34.5 IC35.12 IC35.13 IC35.14 IC35.15 IC35.16 IC35.17 IC36.5 J49.a1 J49.a2 J49.a3 J49.a4 J49.a5 J49.a6 J49.a7 J49.a8 J49.a10 J49.a12 J49.a13 J49.a14 J49.a15 J49.a16 J49.a18 J49.a20 J49.a21 J49.a22 J49.a23 J49.a24 J49.a25 J49.a26 J49.a27 J49.a28 J49.a29 J49.a30 J49.a31 J49.b1 J49.b3 J49.b4 J49.b5 J49.b6 J49.b7 J49.b8 J49.b9 J49.b10 J49.b11 J49.b13 J49.b14 J49.b15 J49.b16 J49.b17 J49.b18 J49.b19 J49.b21 J49.b24 J49.b25 J49.b26 J49.b27 J49.b28 J49.b29 J49.b30 J49.c1 J49.c2 J49.c3 J49.c4 J49.c5 J49.c6 J49.c7 J49.c8 J49.c10 J49.c11 J49.c12 J49.c13 J49.c14 J49.c15 J49.c16 J49.c17 J49.c18 J49.c19 J49.c20 J49.c21 J49.c22 J49.c23 J49.c24 J49.c25 J49.c26 J49.c27 J49.c28 J49.c29 J49.c30 J49.MTG1 J49.MTG2 J50.3

## Polygon pours and split planes (outlines as drawn)
GND on TopLayer "top_gnd" (solid, remove dead copper, pour order 0): 240,3819 6090,3819 6090,3619 6240,3619 6240,319 6090,319 6090,119 240,119 240,319 -2,319 -2,3619 240,3619
GND on BottomLayer "top_gnd" (solid, remove dead copper, pour order 2): 240,3819 6090,3819 6090,3619 6240,3619 6240,319 6090,319 6090,123.09 6092.52,120.57 6090.95,119 240,119 240,319 -2,319 -2,3619 240,3619
INPUT_GND on Internal Plane 1 (split plane): 5836.58,3490.58 5837.23,3490.15 5838,3489.99 6039.17,3489.99 6064.99,3464.17 6064.99,3381.83 6040.17,3357.01 5742.83,3357.01 5529.42,3570.42 5528.77,3570.85 5528,3571.01 5452.83,3571.01 5404.01,3619.83 5404.01,3656.17 5442.83,3694.99 5632.17,3694.99
GND on Internal Plane 1 (split plane): 6278.9,20.1 20.1,20.1 20.1,3916.9 6278.9,3916.9
P12V0 on Internal Plane 2 (split plane): 5844.44,3552.65 5844.44,602.36 5844.64,600.82 5844.99,599.98 5845.24,599.38 5846.18,598.15 5865.87,578.47 5867.1,577.52 5867.7,577.27 5868.54,576.92 5870.08,576.72 6025.09,576.72 6049.16,552.65 6049.16,494.59 6032.97,478.4 5933.07,478.4 5931.53,478.19 5930.09,477.6 5928.86,476.65 5792.81,340.6 2596.96,340.6 2568.95,368.61 2568.95,497.53 2608.77,537.35 5677.17,537.35 5678.71,537.55 5680.14,538.15 5681.38,539.1 5701.06,558.78 5702.01,560.01 5702.6,561.45 5702.81,562.99 5702.81,3231.52 5702.6,3233.06 5702.18,3234.08 5702.01,3234.5 5701.06,3235.73 5558.57,3378.23 5557.33,3379.17 5556.74,3379.42 5555.9,3379.77 5554.35,3379.97 4852.86,3379.97 4789.42,3443.41 4789.42,3588.08 4880.42,3679.08 5718.01,3679.08
GND on Internal Plane 2 (split plane): 6278.9,20.1 20.1,20.1 20.1,3916.9 6278.9,3916.9

## Keep-outs
KeepOutLayer:
  lines w8: -2,319 240,319 240,119 6090,119 6090,319 6240,319 6240,3619 6090,3619 6090,3819 240,3819 240,3619 -2,3619 -2,319

## Other copper
TopLayer:
  rectangle net P12V0: 4927.02,3538.05 5022.02,3616.05
  rectangle net GND: 4661.02,3469.05 4756.02,3547.05
Internal Plane 1 (plane layer: these items are gaps in the copper):
  lines w3.94: 5402,3619 5402,3657 5442,3697 5485,3697 5633,3697 5838,3492 6040,3492 6067,3465 6067,3381 6041,3355 5742,3355 5528,3569 5452,3569 5402,3619
Internal Plane 2 (plane layer: these items are gaps in the copper):
  lines w11.81: 2562.99,366.14 2594.49,334.65 5795.28,334.65 5933.07,472.44 6035.43,472.44 6055.12,492.13 6055.12,555.12 6027.56,582.68 5870.08,582.68 5850.39,602.36 5850.39,3555.12 5720.47,3685.04 4877.95,3685.04 4783.46,3590.55 4783.46,3440.94 4850.39,3374.02 5554.35,3374.02 5696.85,3231.52 5696.85,562.99 5677.17,543.31 2606.3,543.31 2562.99,500 2562.99,366.14

## Silkscreen, mask and mechanical layers (free items; w line width, h text height)
TopOverlay:
  drawing of 1218 lines, arcs and shapes, not listed
  text "PCB VHDCI breakout rev1.0" at 2192,2928 h59.06
  text "8x Extension boards" at 3777.01,2138.83 h59.06
  text "To METLINO" at 727,2098 h59.06 r90
BottomOverlay:
  drawing of 1216 lines, arcs and shapes, not listed
Mechanical1:
  the board outline again, w20

## Dimensions
140,-20 to 0,0 on Mechanical4
-20,217 to 0,0 on Mechanical4

## Text inside footprints (layer, text, board x,y; h text height)
FL1: TopOverlay "CG" at 5365.38,3477.88 h47.24 r270; TopOverlay "PSG" at 5542.54,3690.48 h47.24 r270; TopOverlay "CG" at 5188.21,3670.8 h47.24 r270; TopOverlay "CB" at 5188.21,3473.94 h47.24 r270; TopOverlay "B" at 5542.54,3446.39 h47.24 r270
J40: TopOverlay "30" at 2781.57,410.67 h40 r270; Mechanical14 "30" at 2781.57,410.67 h40 r270
J41: TopOverlay "30" at 3194.96,410.67 h40 r270; Mechanical14 "30" at 3194.96,410.67 h40 r270
J42: TopOverlay "30" at 3608.34,410.67 h40 r270; Mechanical14 "30" at 3608.34,410.67 h40 r270
J43: TopOverlay "30" at 4021.73,410.67 h40 r270; Mechanical14 "30" at 4021.73,410.67 h40 r270
J44: TopOverlay "UPPER" at 395.01,2264.45 h47.24 r90; Mechanical14 "UPPER" at 395.01,2264.45 h47.24 r90; Mechanical14 "LOWER" at 29.26,2266.42 h47.24 r90
J45: TopOverlay "30" at 5694.96,410.67 h40 r270; Mechanical14 "30" at 5694.96,410.67 h40 r270
J46: TopOverlay "30" at 5281.57,410.67 h40 r270; Mechanical14 "30" at 5281.57,410.67 h40 r270
J47: TopOverlay "30" at 4848.5,410.67 h40 r270; Mechanical14 "30" at 4848.5,410.67 h40 r270
J48: TopOverlay "30" at 4435.11,410.67 h40 r270; Mechanical14 "30" at 4435.11,410.67 h40 r270
J49: TopOverlay "30" at 5752.6,593.41 h47.24; TopOverlay "25" at 5757,1104 h47.24; TopOverlay "20" at 5752.6,1593.41 h47.24; TopOverlay "15" at 5756.54,2097.35 h47.24; TopOverlay "10" at 5755.55,2593.41 h47.24; TopOverlay "5" at 5796.89,3091.44 h47.24; TopOverlay "32" at 5752.6,393.41 h47.24; TopOverlay "1" at 5812.64,3497.35 h47.24; TopOverlay "c" at 5897.09,3598.72 h47.24 r90; TopOverlay "b" at 5981.73,3600.89 h47.24 r90; TopOverlay "a" at 6043.74,3599.71 h47.24 r90; Mechanical14 "a" at 6043.74,3599.71 h47.24 r90; Mechanical14 "b" at 5981.73,3600.89 h47.24 r90; Mechanical14 "c" at 5897.09,3598.72 h47.24 r90; Mechanical14 "30" at 5752.6,593.41 h47.24; Mechanical14 "25" at 5752.6,1093.41 h47.24; Mechanical14 "20" at 5752.6,1593.41 h47.24; Mechanical14 "15" at 5756.54,2097.35 h47.24; Mechanical14 "10" at 5755.55,2593.41 h47.24; Mechanical14 "5" at 5796.89,3091.44 h47.24; Mechanical14 "32" at 5752.6,393.41 h47.24; Mechanical14 "1" at 5812.64,3497.35 h47.24; Mechanical14 "c" at 5915,3494 h47.24 r90; Mechanical14 "a" at 6115,3494 h47.24 r90; Mechanical8 "PCB" at 6290,1894 h47.24 r90